# Altium PCB ind3200.PcbDoc
Units mm, origin at the board's own origin, x right, y up, seen from the top; angles counter-clockwise.
Board outline 32 x 42 mm, 2 copper layers (Top, Bottom); 16 components, 15 nets, 38 pads, 0 vias.
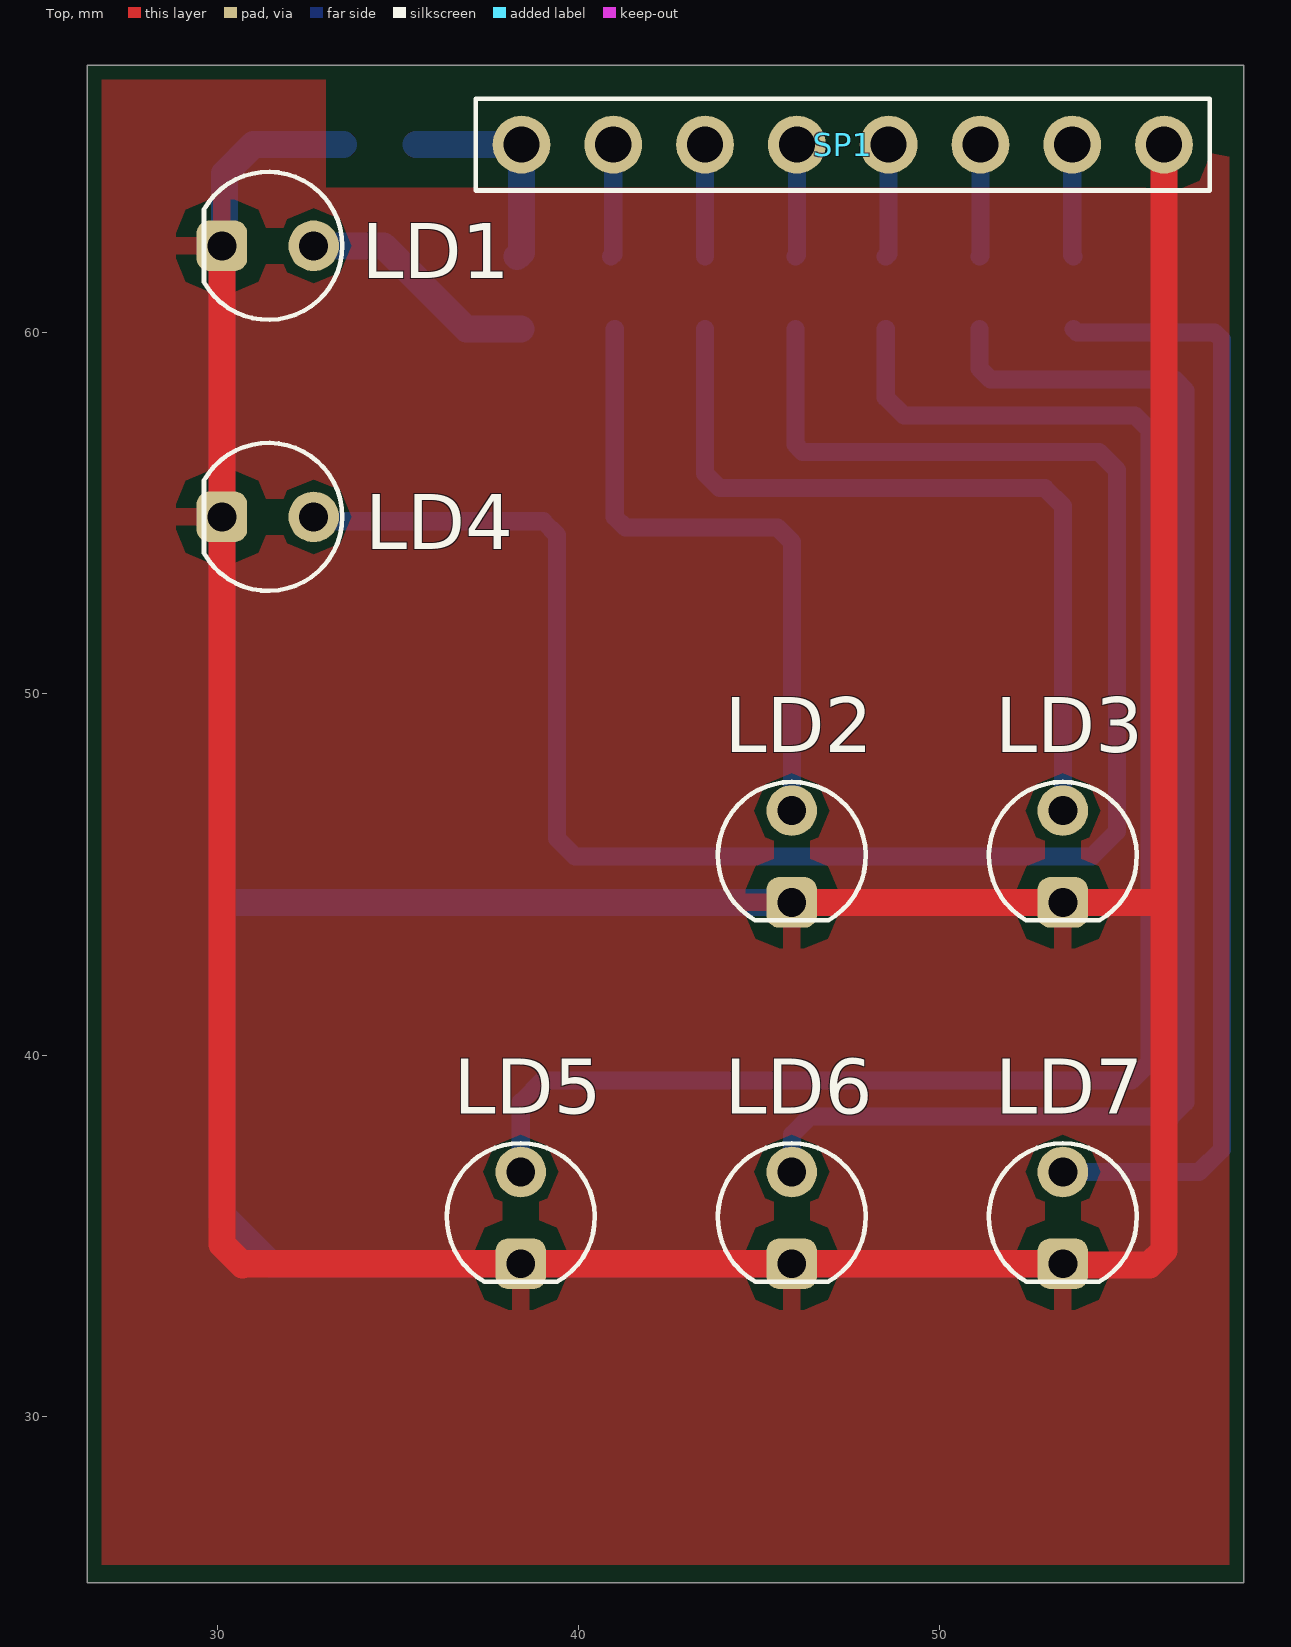
[diagram p0: Top view]
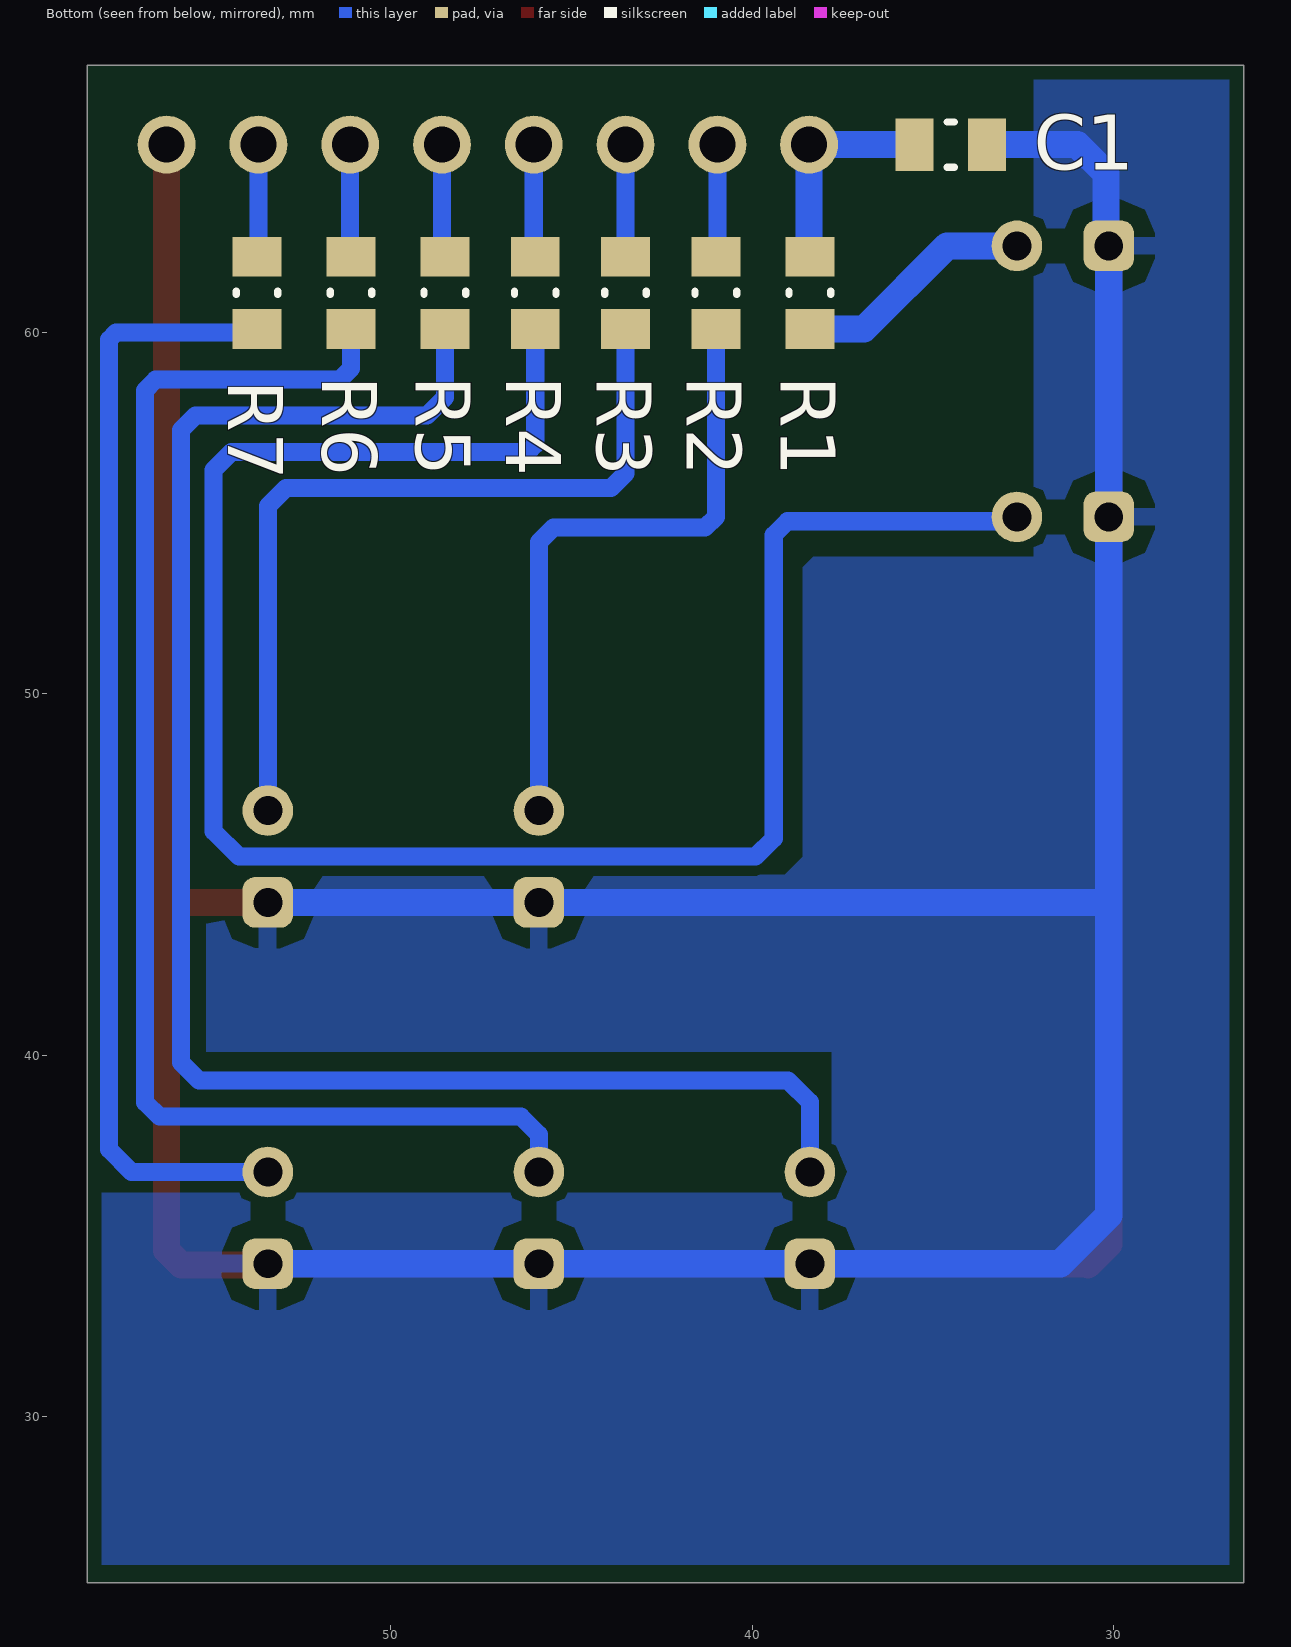
[diagram p1: Bottom view, seen from below]

## Layer stack, top to bottom
Top Solder: solder mask 0.0102, Solder Resist, Dk 3.5
Top: signal copper 0.0356
Dielectric 1: dielectric 0.32, FR-4, Dk 4.8
Bottom: signal copper 0.0356
Bottom Solder: solder mask 0.0102, Solder Resist, Dk 3.5

## Board outline
26.4,25.4 58.4,25.4 58.4,67.4 26.4,67.4

## Design rules (kind name [scope] priority, off if disabled: settings)
Clearance [All] p1: gap=0.254
PolygonConnect [All] p1: connectstyle=Relief reliefconductorwidth=0.5 reliefentries=4 polygonreliefangle="90 Angle" airgapwidth=0.5
RoutingVias [All] p1: holewidth=0.711 width=1.27 viastyle="Through Hole" minholewidth=0.711 minwidth=1.27 maxholewidth=0.711 maxwidth=1.27
SolderMaskExpansion [All] p1: expansion=0.102
Width [All] p1: maxlimit=1 minlimit=0.254 preferedwidth=0.254
29 further rules are at their usual default settings.

## Components (designator, comment, footprint, x,y, rotation, side; value= is the part's Value field where it differs from the comment)
C1 "0.1" CAPC2113X13N_0805 34.5,65.2 r0 bottom
LD1 "Green" LED_3 31.4,62.4 r180 top
LD2 "Green" LED_3 45.9,45.5 r270 top
LD3 "Green" LED_3 53.4,45.5 r270 top
LD4 "Red" LED_3 31.4,54.9 r180 top
LD5 "Yell" LED_3 38.4,35.5 r270 top
LD6 "Yell" LED_3 45.9,35.5 r270 top
LD7 "Yell" LED_3 53.4,35.5 r270 top
R1 "1k" RESC2113X0805N 38.4,61.1 r90 bottom
R2 "1k" RESC2113X0805N 41,61.1 r90 bottom
R3 "1k" RESC2113X0805N 43.5,61.1 r90 bottom
R4 "1k" RESC2113X0805N 46,61.1 r90 bottom
R5 "1k" RESC2113X0805N 48.5,61.1 r90 bottom
R6 "1k" RESC2113X0805N 51.1,61.1 r90 bottom
R7 "1k" RESC2113X0805N 53.7,61.1 r90 bottom
SP1 "SP1" Conn8x1 56.2,65.2 r90 top

## Footprints (in the part's own frame and the unit in brackets; to place one, negate y for a bottom-side part, rotate by r counter-clockwise, add the part's x,y. Pads: shape width x height; smd on the part's side, far side on the other; paste and mask are expansions set on the pad)
CAPC2113X13N_0805 [mm] "Chip Capacitor, 2-Leads, Body 2.10x1.30mm, IPC Medium Density"
  rect 1.05x1.45 smd: 1(-1,0) 2(1,0)
  silkscreen extent -0.1,-0.63 0.1,0.63, body extent -1.1,-0.7 1.1,0.7, height 1.3
Conn8x1 [mm]
  round 1.6 hole 1: 1(0,0) 2(0,2.54) 3(0,5.08) 4(0,7.62) 5(0,10.16) 6(0,12.7) 7(0,15.24) 8(0,17.78)
  silkscreen extent -1.27,-1.27 1.27,19.05
LED_3 [mm]
  round 1.4 hole 0.8: 1(-1.27,0)
  rrect50% 1.4x1.4 hole 0.8: 2(1.27,0)
  silkscreen extent -2.06,-2.05 1.77,2.05
RESC2113X0805N [mm] "Chip Resistor, 2-Leads, Body 2.10x1.30mm, IPC Medium Density"
  rect 1.1x1.35 smd: 1(-1,0) 2(1,0)
  silkscreen extent -0.05,-0.58 0.05,0.58, body extent -1.1,-0.7 1.1,0.7, height 0.5

## Part data
C1: library part cap_1
LD1 LD2 LD3 LD4 LD5 LD6 LD7: library part LED_1
R1 R2 R3 R4 R5 R6 R7: library part rez_1
SP1: library part Conn8x1

## Nets (pads, with @x,y where several pads share a name; then routed paths per layer and width w, separated by ;. In a path a pad name is that pad's centre, name@x,y a point inside that pad or via, vN(x,y) a via of type N, cw(c..) or ccw(c..) an arc to the next point about the centre after c; other vN are vias at no path point)
+5V: C1.2 R1.2 SP1.8 | length 6.1
  Bottom w0.75: C1.2 SP1.8 38.42,62.22 R1.2@38.3,62.1
DI0: R5.2 SP1.4 | length 3.1
  Bottom w0.5: R5.2 48.58,62.18 SP1.4
DI1: R6.2 SP1.3 | length 3.1
  Bottom w0.5: R6.2 51.12,62.12 SP1.3
DI2: R7.2 SP1.2 | length 3.1
  Bottom w0.5: SP1.2 53.66,62.14 R7.2
DO0: R2.2 SP1.7 | length 3.1
  Bottom w0.5: R2.2@40.9,62.1 40.96,62.16 SP1.7
DO1: R3.2 SP1.6 | length 3.1
  Bottom w0.5: R3.2 SP1.6
GND: C1.1 LD1.2 LD2.2 LD3.2 LD4.2 LD5.2 LD6.2 LD7.2 SP1.1 | length 174.6
  Top w0.75: LD1.2 LD4.2 30.13,34.77 30.7,34.2 30.73,34.23 LD5.2 LD6.2 LD7.2 53.43,34.2 55.8,34.2 56.2,34.6 56.2,44.2 ; LD2.2 LD3.2 56.17,44.23 56.2,44.2 ; SP1.1 56.2,44.2
  Bottom w0.75: C1.1 31,65.2 30.2,64.4 30.2,62.47 LD1.2 LD4.2 30.13,44.2 ; LD7.2 LD6.2 LD5.2 31.47,34.23 30.13,35.57 30.13,44.2 ; LD3.2 LD2.2 30.16,44.23 30.13,44.2
NET_LED: R4.2 SP1.5 | length 3.1
  Bottom w0.5: R4.2 46.04,62.14 SP1.5
NetLD1_1: LD1.1 R1.1 | length 6.7
  Bottom w0.75: LD1.1 34.6,62.4 36.9,60.1 R1.1
NetLD2_1: LD2.1 R2.1 | length 17.8
  Bottom w0.5: R2.1 41,54.9 41.3,54.6 45.5,54.6 45.9,54.2 LD2.1
NetLD3_1: LD3.1 R3.1 | length 22.7
  Bottom w0.5: R3.1 43.5,56.1 43.9,55.7 52.9,55.7 53.4,55.2 LD3.1
NetLD4_1: LD4.1 R4.1 | length 53.7
  Bottom w0.5: LD4.1 32.792,54.778 39.022,54.778 39.4,54.4 39.4,46 39.9,45.5 54.2,45.5 54.9,46.2 54.9,56.2 54.4,56.7 46.2,56.7 46,56.9 R4.1
NetLD5_1: LD5.1 R5.1 | length 46.9
  Bottom w0.5: LD5.1 38.4,38.7 39,39.3 55.3,39.3 55.8,39.8 55.8,57.3 55.4,57.7 49,57.7 48.5,58.2 R5.1
NetLD6_1: LD6.1 R6.1 | length 39.1
  Bottom w0.5: LD6.1 45.9,37.8 46.4,38.3 56.4,38.3 56.8,38.7 56.8,58.4 56.5,58.7 51.4,58.7 51.1,59 R6.1
NetLD7_1: LD7.1 R7.1 | length 31.3
  Bottom w0.5: LD7.1 57.17,36.77 57.8,37.4 57.8,59.8 57.6,60 53.8,60 R7.1

## Polygon pours and split planes (outlines as drawn)
GND on Top "Bottom-No Net" (solid, pour order 2): 33,67 26.8,67 26.8,25.9 57.5,25.9 58,25.9 58,67 55.2,67 55,66.8 55,64 33,64
GND on Bottom "Bottom-No Net" (solid, pour order 4): 26.8,67 26.8,25.9 58,25.9 58,36.2 37.8,36.2 37.8,40.1 55.1,40.1 55.1,45 39.1,45 38.6,45.5 38.6,45.7 38.6,53.5 38.3,53.8 32.2,53.8 32.2,67

## Silkscreen, mask and mechanical layers (free items; w line width, h text height)
Board:
  the board outline again, w0.127